# EAGLE board microHDMI-FTP (EAGLE 6.2)
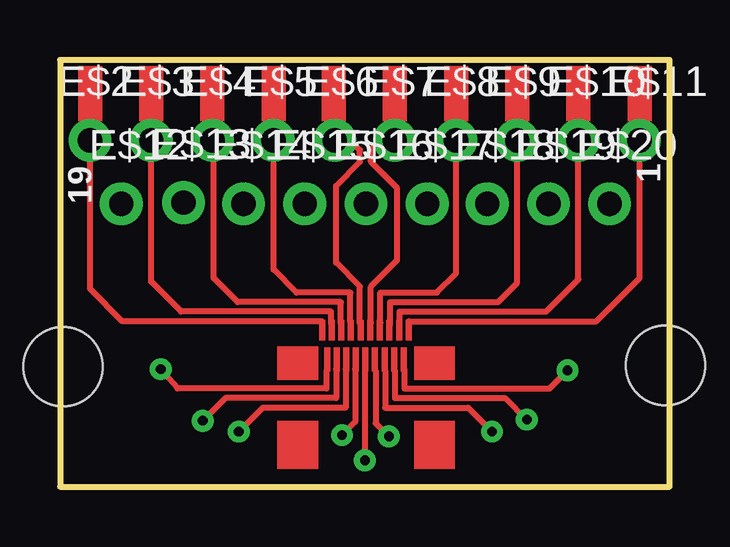
[diagram p0: board, top side]
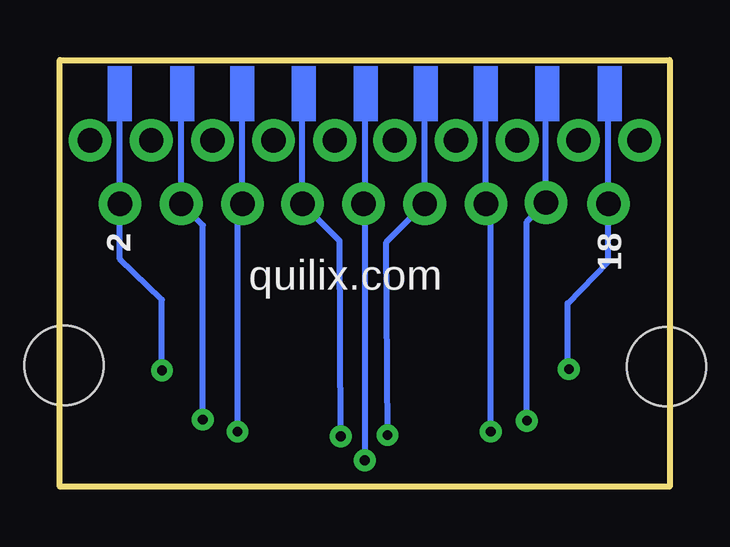
[diagram p1: board, bottom side, seen from below]

Size 25.4 x 17.8 mm. Coordinates in mm from the lower left corner, seen from the top.
Outline: 0,0 25.4,0 25.4,17.8 0,17.8 0,0
Copper layers (1*16): Top 0.035mm / dielectric 1.5mm / Bottom 0.035mm
Design rules: minimum track width 8mil, minimum drill 20mil, track to track 8mil, track to pad 8mil, pad to pad 8mil, via to via 8mil, smd to smd 8mil, copper to edge 9mil, drill to drill 8mil, minimum pad ring 12mil, minimum via ring 10mil, stop-mask expansion 4mil, vias tented up to drill 20mil, thermal gap 10mil
tKeepout: area 10.4,0 to 15.1,4.2

## Footprints (pad centres in the part's own frame; a part is rotated, then mirrored left to right if it is on the bottom)
1X01-CLEANBIG = drill 1.016 pad 1.778: 1 0,0
STAND-OFF = hole 3.302: 0,0

## Placement (x,y rotation side)
E$2  [1X01-CLEANBIG]  1.25,14.45 0 top
E$3  [1X01-CLEANBIG]  3.8,14.45 0 top
E$4  [1X01-CLEANBIG]  6.35,14.45 0 top
E$5  [1X01-CLEANBIG]  8.9,14.45 0 top
E$6  [1X01-CLEANBIG]  11.45,14.45 0 top
E$7  [1X01-CLEANBIG]  13.95,14.45 0 top
E$8  [1X01-CLEANBIG]  16.5,14.45 0 top
E$9  [1X01-CLEANBIG]  19.05,14.45 0 top
E$10  [1X01-CLEANBIG]  21.6,14.45 0 top
E$11  [1X01-CLEANBIG]  24.15,14.45 0 top
E$12  [1X01-CLEANBIG]  2.55,11.8 0 top
E$13  [1X01-CLEANBIG]  5.15,11.85 0 top
E$14  [1X01-CLEANBIG]  7.65,11.8 0 top
E$15  [1X01-CLEANBIG]  10.2,11.8 0 top
E$16  [1X01-CLEANBIG]  12.75,11.8 0 top
E$17  [1X01-CLEANBIG]  15.3,11.8 0 top
E$18  [1X01-CLEANBIG]  17.8,11.8 0 top
E$19  [1X01-CLEANBIG]  20.35,11.8 0 top
E$20  [1X01-CLEANBIG]  22.9,11.8 0 top
JP3  STAND-OFF  [STAND-OFF]  25.23,5.06 0 top
JP4  STAND-OFF  [STAND-OFF]  0.13,5.01 0 top

## Library data of the parts
E$2-E$20 = adafruit
JP3 JP4 = SparkFun

## Nets
S$13: E$17.1
S$14: E$15.1
S$15: E$14.1
S$16: E$19.1
S$17: E$12.1
S$19: E$13.1
S$24: E$18.1
S$31: E$20.1

## Tracks (layer width: path | path; a pad name or v marks a point on that pad's centre or on a via)
S$1
  Bottom 0.254: 12.7,15.4 12.7,1.15
S$2
  Top 0.254: 14.55,6.9 22.35,6.9 24.15,8.7 24.15,15.45
S$3
  Top 0.254: 14.15,6.8 14.15,7.3 20.25,7.3 21.6,8.65 21.6,15.45
S$4
  Top 0.254: 13.75,6.75 13.75,7.7 18.25,7.7 19.05,8.5 19.05,15.4
S$5
  Top 0.254: 13.35,6.85 13.35,8.1 15.7,8.1 16.5,8.9 16.5,15.4
S$6
  Top 0.254: 12.95,6.85 12.95,8.35 14.05,9.45 14.05,12.45 12.95,13.55 12.95,14.05 13.95,15.05 13.95,15.55
S$7
  Top 0.254: 12.5,6.8 12.5,8.35 11.5,9.35 11.5,12.55 12.5,13.55 12.5,14.05 11.35,15.2 11.35,15.45
S$8
  Top 0.254: 12.1,6.85 12.1,8.1 9.85,8.1 8.9,9.05 8.9,15.4
S$9
  Top 0.254: 11.7,6.8 11.7,7.7 7.4,7.7 6.4,8.7 6.4,15.4
S$10
  Top 0.254: 11.3,6.8 11.3,7.3 5.05,7.3 3.8,8.55 3.8,15.4
S$11
  Top 0.254: 10.9,6.9 2.6,6.9 1.25,8.25 1.25,15.45
S$12  (via drill 0.4)
  other vias: 12.7,1.1
S$13  (via drill 0.4)
  Top 0.254: 13.15,4.85 13.15,2.65 v13.7,2.1
  Bottom 0.254: 15.3,15.55 E$17.1 13.75,10.25 v13.7,2.1
S$14  (via drill 0.4)
  Top 0.254: 12.3,4.9 12.3,2.7 v11.75,2.15
  Bottom 0.254: 10.2,15.5 E$15.1 11.8,10.2 v11.75,2.15
S$15
  Bottom 0.254: 7.65,15.55 E$14.1 7.45,11.65 7.45,2.3
S$16  (via drill 0.4)
  Bottom 0.254: 20.35,15.45 E$19.1 19.45,10.9 v19.45,2.8
S$17
  Bottom 0.254: 4.25,4.9 4.25,7.65 2.55,9.4 E$12.1 2.55,15.5
S$19  (via drill 0.4)
  Bottom 0.254: 5.15,15.5 E$13.1 5.95,11.05 v5.95,2.75
S$21
  Top 0.254: 12.7,4.85 12.7,1.1
S$22  (via drill 0.4)
  Top 0.254: 14.35,4.9 14.35,4.1 20.4,4.1 v21.15,4.85
  Bottom 0.254: v21.15,4.85 21.15,7.8 22.9,9.5 22.9,11.65
S$23
  Top 0.254: 13.95,4.85 13.95,3.7 18.55,3.7 19.45,2.8
S$24  (via drill 0.4)
  Top 0.254: 13.55,4.85 13.55,3.3 17,3.3 v18,2.3
  Bottom 0.254: 17.8,15.6 E$18.1 18,11.6 v18,2.3
S$25  (via drill 0.4)
  Top 0.254: 11.1,4.85 11.1,4.1 4.9,4.1 v4.2,4.9
S$26
  Top 0.254: 11.5,4.9 11.5,3.7 6.9,3.7 5.95,2.75
S$27  (via drill 0.4)
  Top 0.254: 11.9,4.9 11.9,3.3 8.45,3.3 v7.45,2.3
S$31
  Bottom 0.254: E$20.1 22.9,15.7
(copper drawn outside any net)
  shapes: Bottom area x9, Top area x33

## Text on the board
_tsilk: 1 | 19
_bsilk: 18 | 2 | quilix.com